# Altium PCB PCB1.PcbDoc
Units mil, origin at the board's own origin, x right, y up, seen from the top; angles counter-clockwise.
Board outline 2168 x 986 mil, 2 copper layers (Top Layer, Bottom Layer); 28 components, 46 nets, 153 pads, 15 vias.
Unrouted connection lines stored in the file: 15.
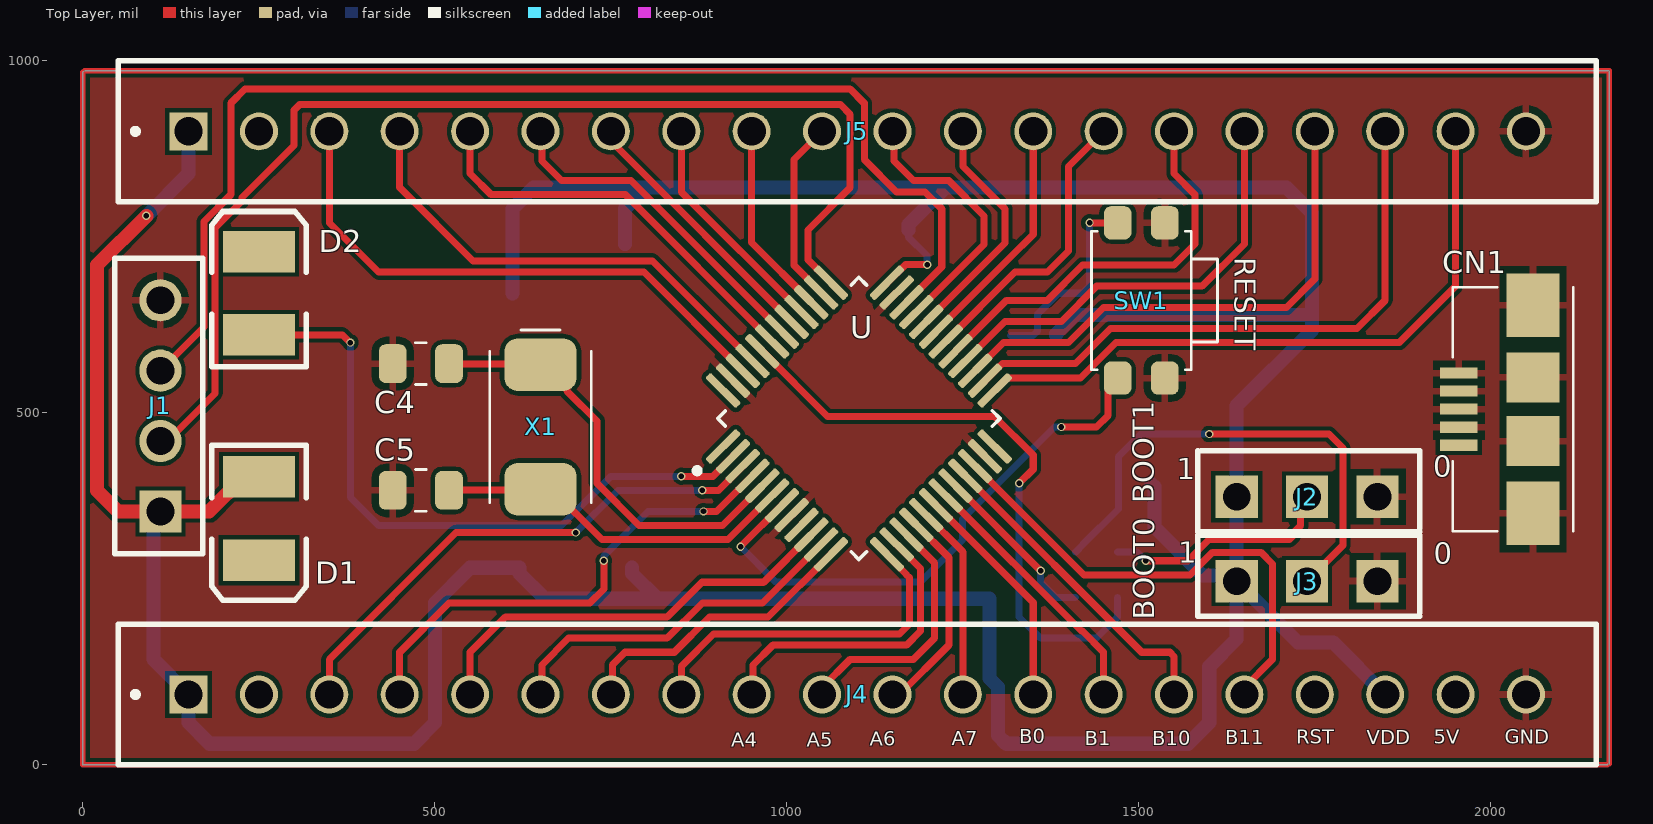
[diagram p0: Top Layer view]
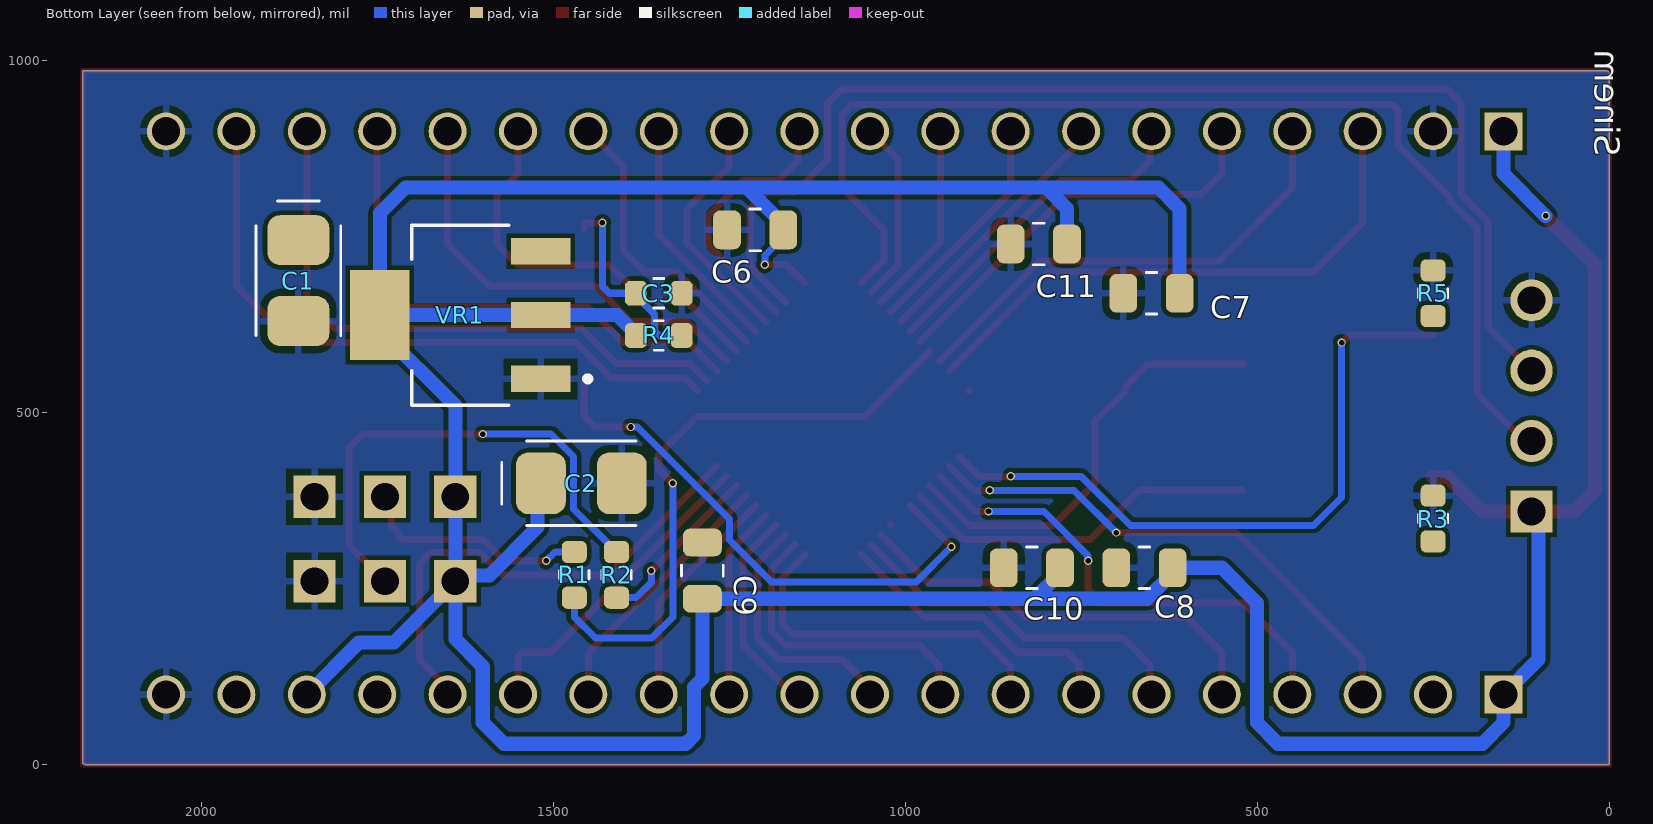
[diagram p1: Bottom Layer view, seen from below]
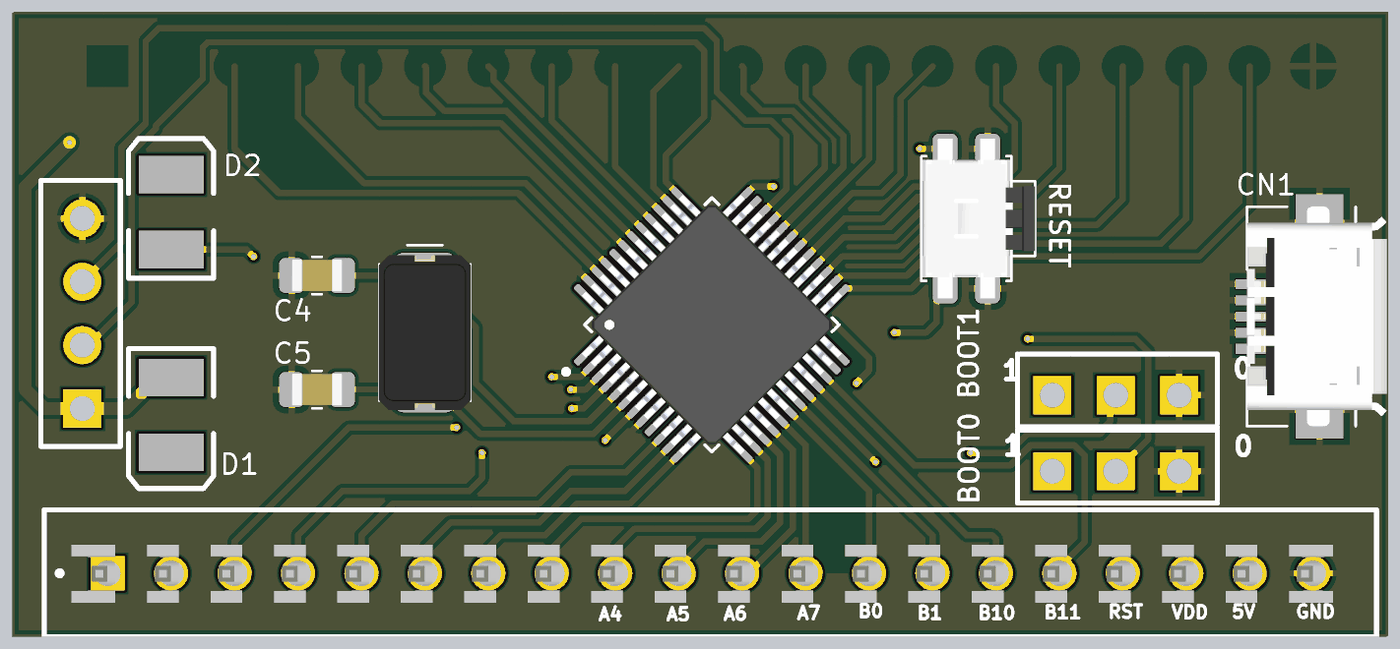
[diagram p2: 3D render of the assembled board from above, using the file's embedded part models]
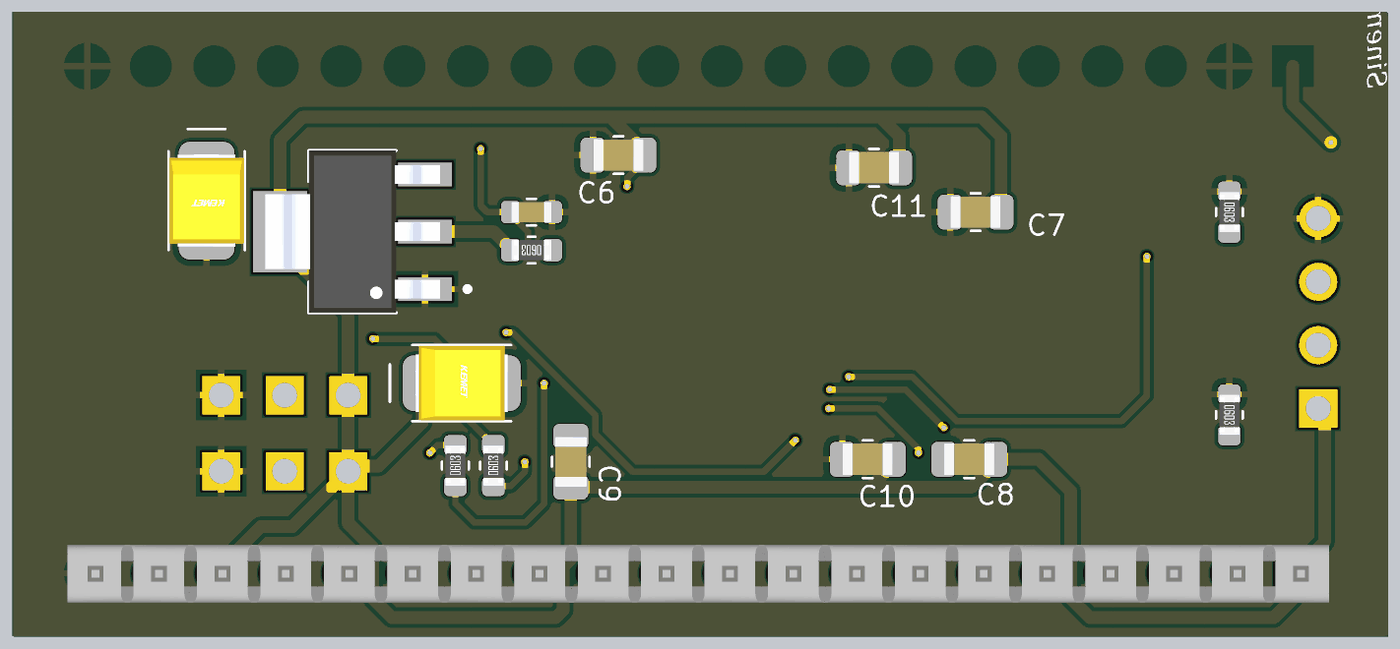
[diagram p3: 3D render of the assembled board from below, using the file's embedded part models]

## Layer stack, top to bottom
Top Solder: solder mask 0.4, Solder Resist, Dk 3.5
Top Layer: signal copper 1.4
Dielectric 1: dielectric 12.6, FR-4, Dk 4.8
Bottom Layer: signal copper 1.4
Bottom Solder: solder mask 0.4, Solder Resist, Dk 3.5

## Board outline
0,0 0,984.25 2.65,986 2168,986 2168,1.75 2165.35,0

## Design rules (kind name [scope] priority, off if disabled: settings)
Clearance [All] p1: gap=6 ignorepadtopadclearanceinfootprint=FALSE except(0: Arc-Hole Track-Hole SMDPad-Hole THPad-Hole Via-Hole Fill-Hole Poly-Hole Region-Hole Text-Hole)
PolygonConnect [All] p1: connectstyle=Relief reliefconductorwidth=10 reliefentries=4 polygonreliefangle="90 Angle" airgapwidth=10
RoutingVias [All] p1: holewidth=28 width=50 viastyle="Through Hole" minholewidth=28 minwidth=50 maxholewidth=28 maxwidth=50
SolderMaskExpansion [All] p1: expansion=4 istentingtop=FALSE
Width [All] p1: maxlimit=50 minlimit=10 preferedwidth=10
30 further rules are at their usual default settings.

## Classes and differential pairs
component class Sheet1: C1 C2 C3 C4 C5 C6 C7 C8 C9 C10 C11 CN1 D1 D2 J1 J2 J3 R1 R2 R3 R4 R5 SW1 U VR1 X1

## Components (designator, comment, footprint, x,y, rotation, side; value= is the part's Value field where it differs from the comment)
C1 "T495B106K025ATE750" KEMET_CAP_TAN-B 1862,688 r270 bottom
C2 "T495B106K025ATE750" KEMET_CAP_TAN-B 1460,400 r180 bottom
C3 "CL10B104KB8NNNC" SAMSUNG_CAP_0603_090 1350,670 r0 bottom
C4 "CL21C270JBANNNC" SAMSUNG_CAP_0805_075 480,570 r0 top
C5 "CL21C270JBANNNC" SAMSUNG_CAP_0805_075 480,390 r0 top
C6 "CL21A475KACLRNC" SAMSUNG_CAP_0805_095 1213,760 r180 bottom
C7 "CL21B104MACNNNC" SAMSUNG_CAP_0805_095 650,670 r180 bottom
C8 "CL21B104MACNNNC" SAMSUNG_CAP_0805_095 660,280 r180 bottom
C9 "CL21B104MACNNNC" SAMSUNG_CAP_0805_095 1288,276 r270 bottom
C10 "CL21B104MACNNNC" SAMSUNG_CAP_0805_095 820,280 r180 bottom
C11 "CL21B104MACNNNC" SAMSUNG_CAP_0805_095 810,740 r180 bottom
CN1 "5UR2M01MF-105G0BUHM1" AMTEK_5UR2M01MF-105G0BUHM1 2000.94,505.28 r90 top
D1 "LED3" 3.5X2.8X1.9 250,350 r270 top
D2 "LED3" 3.5X2.8X1.9 250,670 r90 top
J1 "HEADER 1X4" "HEADER 1X4_2.54mm" 130,365 r90 top
J2 "HEADER 1X3" "HEADER 1X3_2.54" 1784,156 r0 top
J3 "HEADER 1X3" "HEADER 1X3_2.54" 1784,36 r0 top
J4 "" "20*1 pin" 1937.24,525.26 r180 top
J5 "" "20*1 pin" 1937.24,1325.26 r180 top
R1 "0603SAJ0103T5E" ROYALOHM_RES_0603 1470,270 r90 bottom
R2 "0603SAJ0103T5E" ROYALOHM_RES_0603 1410,270 r90 bottom
R3 "0603SAJ0331T5E" ROYALOHM_RES_0603 250,350 r270 bottom
R4 "0603SAJ0103T5E" ROYALOHM_RES_0603 1350,610 r0 bottom
R5 "0603SAJ0331T5E" ROYALOHM_RES_0603 250,670 r270 bottom
SW1 "434331045822" WURTH_434331045822 1503.46,659.76 r270 top
U "STM32F103CBT6" QFP50P900X900X160-48N 1102.36,492.13 r45 top
VR1 "LM1117MPX-3.3" VREG_LM1117MPX-3.3 1632,639 r0 bottom
X1 "ABM7-8.000MHZ-D2Y-T" ABRACON_ABM7 650,480 r270 top

## Footprints (in the part's own frame and the unit in brackets; to place one, negate y for a bottom-side part, rotate by r counter-clockwise, add the part's x,y. Pads: shape width x height; smd on the part's side, far side on the other; paste and mask are expansions set on the pad)
3.5X2.8X1.9 [mm] "SM LED; 2 C-Bend Leads; Body 3.5 x 2.8 x 1.9 mm, inc leads (LxWxH typ)"
  rect 1.5x2.6 smd: 1(-1.5,0) 2(1.5,0)
  silkscreen extent -2.65,-1.7 2.95,1.7
"20*1 pin" [mm]
  rect 1.37x1.37 hole 1.02: 1(45.396,10.802)
  round 1.37 hole 1.02: 2(42.856,10.802) 3(40.316,10.802) 4(37.776,10.802) 5(35.236,10.802) 6(32.696,10.802) 7(30.156,10.802) 8(27.616,10.802) 9(25.076,10.802) 10(22.536,10.802) 11(19.996,10.802) 12(17.456,10.802) 13(14.916,10.802) 14(12.376,10.802) 15(9.836,10.802) 16(7.296,10.802) 17(4.756,10.802) 18(2.216,10.802) 19(-0.324,10.802) 20(-2.864,10.802)
  silkscreen extent -5.4,8.26 47.94,13.34, body extent -3.66,9.65 46.84,11.99, height 2.79
ABRACON_ABM7 [mm]
  rrect50% 1.9x2.6 smd paste+0 mask+0.04: 1(-2.25,0) 2(2.25,0)
  silkscreen extent -3.5,-1.83 2.73,1.83, body extent -3.1,-1.85 3.1,1.85, height 1.39
AMTEK_5UR2M01MF-105G0BUHM1 [mm]
  rect 0.4x1.35 smd mask+0.04: 1(-1.3,1.175) 2(-0.65,1.175) 3(0,1.175) 4(0.65,1.175) 5(1.3,1.175)
  rect 2.3x1.9 smd mask+0.04: S(-3.75,-1.5) S(3.75,-1.5)
  rect 1.8x1.9 smd mask+0.04: S(-1.15,-1.5) S(1.15,-1.5)
  silkscreen extent -4.4,-2.95 4.4,1.4, body extent -4.4,-4.2 4.4,1.4, height 2.83
"HEADER 1X3_2.54" [mil]
  rect 60x60 hole 39.37: 1(-145,225) 2(-45,225) 3(55,225)
  silkscreen extent -200,175 115,290, body extent -195,180 105,280, height 276
"HEADER 1X4_2.54mm" [mil]
  rect 60x60 hole 39.37: 1(-5,20)
  round 60 hole 39.37: 2(95,20) 3(195,20) 4(295,20)
  silkscreen extent -65,-40 355,85, body extent -55,-30 345,70, height 276
KEMET_CAP_TAN-B [mm]
  rrect50% 1.8x2.23 smd paste+0 mask+0.04: 1(-1.46,0) 2(1.46,0)
  silkscreen extent -2.88,-1.53 1.98,1.53, body extent -1.85,-1.5 1.85,1.5, height 2.1
QFP50P900X900X160-48N [mm]
  rrect50% 1.56x0.28 smd: 1(-4.18,2.75) 2(-4.18,2.25) 3(-4.18,1.75) 4(-4.18,1.25) 5(-4.18,0.75) 6(-4.18,0.25) 7(-4.18,-0.25) 8(-4.18,-0.75) 9(-4.18,-1.25) 10(-4.18,-1.75) 11(-4.18,-2.25) 12(-4.18,-2.75) 25(4.18,-2.75) 26(4.18,-2.25) 27(4.18,-1.75) 28(4.18,-1.25) 29(4.18,-0.75) 30(4.18,-0.25) 31(4.18,0.25) 32(4.18,0.75) 33(4.18,1.25) 34(4.18,1.75) 35(4.18,2.25) 36(4.18,2.75)
  rrect50% 0.28x1.56 smd: 13(-2.75,-4.18) 14(-2.25,-4.18) 15(-1.75,-4.18) 16(-1.25,-4.18) 17(-0.75,-4.18) 18(-0.25,-4.18) 19(0.25,-4.18) 20(0.75,-4.18) 21(1.25,-4.18) 22(1.75,-4.18) 23(2.25,-4.18) 24(2.75,-4.18) 37(2.75,4.18) 38(2.25,4.18) 39(1.75,4.18) 40(1.25,4.18) 41(0.75,4.18) 42(0.25,4.18) 43(-0.25,4.18) 44(-0.75,4.18) 45(-1.25,4.18) 46(-1.75,4.18) 47(-2.25,4.18) 48(-2.75,4.18)
  silkscreen extent -5.56,-3.6 3.6,3.6, body extent -4.5,-4.5 4.5,4.5, height 1.6
ROYALOHM_RES_0603 [mm]
  rrect50% 0.8x0.9 smd paste+0 mask+0.04: 1(-0.825,0) 2(0.825,0)
  silkscreen extent -0.15,-0.53 0.15,0.53, body extent -0.8,-0.4 0.8,0.4, height 0.45
SAMSUNG_CAP_0603_090 [mm]
  rrect50% 0.8x0.9 smd paste+0 mask+0.04: 1(-0.825,0) 2(0.825,0)
  silkscreen extent -0.18,-0.53 0.18,0.53, body extent -0.8,-0.41 0.8,0.41, height 0.81
SAMSUNG_CAP_0805_075 [mm]
  rrect50% 1x1.4 smd paste+0 mask+0.04: 1(-1.016,0) 2(1.016,0)
  silkscreen extent -0.19,-0.75 0.19,0.75, body extent -1,-0.64 1,0.64, height 0.76
SAMSUNG_CAP_0805_095 [mm]
  rrect50% 1x1.4 smd paste+0 mask+0.04: 1(-1.016,0) 2(1.016,0)
  silkscreen extent -0.19,-0.75 0.19,0.75, body extent -1,-0.64 1,0.64, height 0.96
VREG_LM1117MPX-3.3 [mm]
  rect 2.15x0.95 smd: 1(-2.9,2.3) 2(-2.9,0) 3(-2.9,-2.3)
  rect 2.15x3.25 smd: 4(2.9,0)
  silkscreen extent -4.7,-3.25 1.75,3.25, body extent -3.5,-3.25 3.5,3.25, height 1.8
WURTH_434331045822 [mm]
  rrect50% 1.2x1 smd mask+0.04: 1(2.8,0.85) 2(2.8,-0.85) 3(-2.8,0.85) 4(-2.8,-0.85)
  silkscreen extent -2.5,-1.8 2.5,2.75, body extent -3.2,-1.75 3.2,2.75, height 1.65

## Part data
C1 C2: "CAP TANT 10UF 10% 25V 1411", Capacitance="10 µF", Supplier Part Number 1=399-18418-1-ND, Supplier 1=Digi-Key, Supplier 2=Farnell, Supplier 3=Mouser, Supplier Part Number 2=2470989, Supplier Part Number 3=80-T495B106K25ATE750
C3: "CAP CER 0.1UF 50V X7R 0603", Capacitance="0.1 µF", Supplier Part Number 1=1276-1000-6-ND, Supplier 1=Digi-Key, Supplier 2=Mouser, Supplier 3="Arrow Electronics", Supplier Part Number 2=187-CL10B104KB8NNNC, Supplier Part Number 3=CL10B104KB8NNNC
C4 C5: "CAP CER 27PF 50V C0G/NP0 0805", Capacitance="27 pF", Supplier Part Number 1=1276-1285-1-ND, Supplier 1=Digi-Key
C6: "CAP CER 4.7UF 25V X5R 0805", Capacitance="4.7 µF", Supplier Part Number 1=1276-2415-1-ND, Supplier 1=Digi-Key, Supplier 2=Mouser, Supplier 3="Arrow Electronics", Supplier Part Number 2=187-CL21A475KACLRNC, Supplier Part Number 3=CL21A475KACLRNC
C7 C8 C9 C10 C11: "CAP CER 0.1UF 25V X7R 0805", Capacitance="0.1 µF", Supplier Part Number 1=1276-2449-1-ND, Supplier 1=Digi-Key, Supplier 2=Mouser, Supplier 3="Arrow Electronics", Supplier Part Number 2=187-CL21B104MACNNNC, Supplier Part Number 3=CL21B104MACNNNC
CN1: "CONN RCPT MICRO USB AB 5P SMD RA"
D1 D2: "Typical BLUE SiC LED", DatasheetVersion=16-Apr-2002, LatestRevisionDate=17-Dec-2003, LatestRevisionNote="PCB Footprint replaced.", PackageDescription="SM LED; 2 C-Bend Leads; Body 3.5 x 2.8 x 1.9 mm, inc leads (LxWxH typ)", PackageReference=3.5X2.8X1.9, PackageVersion=16-Apr-2002, Published=8-Jun-2000, Publisher="Altium Limited"
J4 J5: library part "20 pin header"
R1 R2 R4: "RES SMD 10K OHM 5% 1/10W 0603", Resistance="10 k"
R3 R5: "RES SMD 330R OHM 5% 1/10W 0603", Resistance=330
SW1: "SWITCH TACTILE SPST-NO 0.05A 12V", Supplier Part Number 1=732-7055-1-ND, Supplier 1=Digi-Key, Supplier 2=Farnell, Supplier 3=Mouser, Supplier Part Number 2=1867997, Supplier Part Number 3=710-434331045822
U: "ARMÂ® CortexÂ®-M3 STM32F1 Microcontroller IC 32-Bit 72MHz 128KB _128K x 8_ FLASH", Package="LQFP-48 STMicroelectronics", Availability=Unavailable, MF=STMicroelectronics, MP=STM32F103CBT6, Price=None, SnapEDA_Link=https://www.snapeda.com/parts/STM32F103CBT6/STMicroelectronics/view-part/38865/?ref=snap
VR1: "800-mA 15-V linear voltage regulator", Package="SOT-223-4 Texas Instruments", Availability="In Stock", Check_prices=https://www.snapeda.com/parts/LM1117MPX-3.3/Texas+Instruments/view-part/?ref=eda, MF="Texas Instruments", MP=LM1117MPX-3.3, Price=None, Purchase-URL=https://pricing.snapeda.com/search/part/LM1117MPX-3.3/?ref=eda, SnapEDA_Link=https://www.snapeda.com/parts/LM1117MPX-3.3/Texas+Instruments/view-part/?ref=snap
X1: "CRYSTAL 8.0000MHZ 18PF SMD", Frequency="8 MHz", Supplier Part Number 1=535-9831-6-ND, Supplier 1=Digi-Key, Supplier 2=Farnell, Supplier 3=Mouser, Supplier 4="Arrow Electronics", Supplier Part Number 2=2101337, Supplier Part Number 3=815-ABM7-8-D2Y-T, Supplier Part Number 4=ABM7-8.000MHZ-D2Y-T

## Via types
v1: diameter 11.81, hole 7.87, Top Layer to Bottom Layer, 15 vias

## Nets (pads, with @x,y where several pads share a name; then routed paths per layer and width w, separated by ;. In a path a pad name is that pad's centre, name@x,y a point inside that pad or via, vN(x,y) a via of type N, cw(c..) or ccw(c..) an arc to the next point about the centre after c; other vN are vias at no path point)
+5V: C1.1 CN1.1 J4.19 VR1.3
BOOT0: R1.1 U.44 | length 876.7
  Top Layer w10: U.44 1057.73,495 1295,495 1350,440 1350,420 v1(1330,400)
  Bottom Layer w10: v1(1330,400) 1330,210 1360,180 1440,180 1470,210 R1.1
BOOT1: R2.1 U.20 | length 245.8
  Top Layer w10: U.20 v1(1360.52,275.73)
  Bottom Layer w10: v1(1360.52,275.73) 1360.52,259.48 1382.48,237.52 R2.1
GND: C1.2 C2.2 C3.1 C4.1 C5.1 C6.1 C7.1 C8.1 C9.1 C10.1 C11.1 CN1.2 CN1.3 CN1.4 CN1.5 CN1.S J1.4 J2.3 J3.3 J4.20 J5.2 J5.20 R3.1 R5.1 SW1.1 SW1.3 U.8 U.23 U.35 U.47 VR1.1
NetD1_2: D1.2 R3.2
NetD2_2: D2.2 R5.2
NetJ2_2: J2.2 R1.2 | length 333
  Top Layer w10: v1(1510,290) 1569.82,290 1599.82,320 1714.14,320 1720,325.86 1720,330 1730,340 1730,372 J2.2
  Bottom Layer w10: R1.2 1497.52,302.48 v1(1510,290)
NetJ3_2: J3.2 R2.2 | length 711.7
  Top Layer w10: v1(1600,470) 1770,470 1790,450 1790,312 J3.2
  Bottom Layer w10: R2.2 1410.41,302.48 1420.94,313.01 1420.94,313.42 1471.05,363.53 1471.05,438.08 1502.97,470 v1(1600,470)
NRST: C3.2 J4.17 R4.1 SW1.2 SW1.4 U.7 | length 1068.3
  Top Layer w10: v1(934.16,310) U.7 ; v1(1390,480) 1440,480 1456.54,496.54 SW1.2@1456.54,541.76 ; v1(1430,770) 1455.68,770 1456.54,769.15 SW1.4@1456.54,762.24
  Bottom Layer w10: v1(934.16,310) 984.16,260 1190,260 1249.44,319.44 1249.44,349.44 1380,480 v1(1390,480) ; R4.1 1349.87,610 1355.73,615.86 1355.73,639.73 1382.48,666.48 C3.2 1420,670 1430,680 v1(1430,770)
OSC_IN: C4.2 U.5 X1.1 | length 619.5
  Top Layer w10: C4.2 520.22,569.78 648.8,569.78 X1.1 656.36,568.58 687.72,537.22 687.72,530.86 730,488.58 730,400 790,340 908.48,340 U.5
OSC_OUT: C5.2 U.6 X1.2 | length 515.2
  Top Layer w10: C5.2 520.22,390.22 648.8,390.22 X1.2 666.01,391.42 737.42,320 916.32,320 U.6
PA0: J4.5 U.10 | length 613.9
  Top Layer w10: J4.5 550,160 600,210 830,210 879.43,259.43 967.1,259.43 U.10
PA1: J4.6 U.11 | length 510.3
  Top Layer w10: J4.6 651.97,101.97 651.97,141.97 690,180 830,180 880,230 965.51,230 U.11
PA2: J4.7 U.12 | length 418.5
  Top Layer w10: J4.7 751.97,101.97 751.97,141.97 770,160 840,160 890,210 973.35,210 U.12
PA3: J4.8 U.13 | length 501.2
  Top Layer w10: J4.8 850,140 896,186 1160,186 1174,200 1174,266 1170,270 1170,270.65 1142.17,298.48 U.13
PA4: J4.9 U.14 | length 437.9
  Top Layer w10: J4.9 951.97,101.97 951.97,141.97 980,170 1170,170 1190,190 1190,279.21 U.14
PA5: J4.10 U.15 | length 362.6
  Top Layer w10: J4.10 1050,110 1090,150 1180,150 1210,180 1210,287.05 U.15
PA6: J4.11 U.16 | length 299
  Top Layer w10: J4.11 1160,100 1230,170 1230,294.89 U.16
PA7: J4.12 U.17 | length 276.5
  Top Layer w10: U.17 1250,302.73 J4.12
PA8: J5.15 U.29 | length 575.9
  Top Layer w10: U.29 1311.99,660 1370,660 1420,710 1550,710 1580,740 1580,810 1550,840 J5.15
PA9: J5.14 U.30 | length 418.2
  Top Layer w10: U.30 1324.16,700 1370,700 1400,730 1400,850 J5.14
PA10: J5.13 U.31 | length 341.8
  Top Layer w10: U.31 1316.32,720 1350,753.68 J5.13
PA11: J5.12 U.32 | length 341.9
  Top Layer w10: U.32 1310,741.52 1310,790 1250,850 J5.12
PA12: J5.11 U.33 | length 379.6
  Top Layer w10: J5.11 1151.97,898.03 1151.97,858.03 1180,830 1230,830 1280,780 1280,739.36 U.33
PA15: J5.10 U.38 | length 261.4
  Top Layer w10: U.38 1010,709.76 1010,860 J5.10
PB0: J4.13 U.18 | length 326.1
  Top Layer w10: U.18 1350,230.57 J4.13
PB1: J4.14 U.19 | length 376.6
  Top Layer w10: U.19 1418.41,190 1420,190 1450,160 J4.14
PB3: J5.9 U.39 | length 277.9
  Top Layer w10: J5.9 950,741.92 U.39
PB4: J5.8 U.40 | length 327.5
  Top Layer w10: J5.8 850,814.09 U.40
PB5: J5.7 U.41 | length 377
  Top Layer w10: J5.7 758.41,891.59 758.41,877.84 U.41
PB6: J5.6 U.42 | length 484.3
  Top Layer w10: J5.6 651.97,898.03 651.97,858.03 680,830 778.41,830 U.42
PB7: J5.5 U.43 | length 587.8
  Top Layer w10: J5.5 550,840 580,810 770.57,810 U.43
PB8: J5.4 U.45 | length 683.2
  Top Layer w10: J5.4 450,820 554,716 808.89,716 U.45
PB9: J5.3 U.46 | length 804.4
  Top Layer w10: J5.3 350,770 420,700 797.05,700 U.46
PB10: J4.15 U.21 | length 456.8
  Top Layer w10: U.21 1504.09,160 1544.14,160 1550,154.14 J4.15
PB11: J4.16 U.22 | length 708.7
  Top Layer w10: U.22 1421.92,270 1572.44,270 1604.44,302 1673.56,302 1690,285.56 1690,150 1650,110 J4.16
PB12: J5.19 U.25 | length 936
  Top Layer w10: U.25 1313.1,549.75 1417.13,549.75 1467.37,600 1870,600 1950,680 J5.19
PB13: J5.18 U.26 | length 7155.1
  Top Layer w7.87: 0,984.25 0,0 2165.35,0 ; 2.65,986 2168,986 2168,1.75
  Top Layer w10: U.26 1282.09,545.85 1306.24,570 1410,570 1460,620 1810,620 1850,660 J5.18
PB14: J5.17 U.27 | length 746.5
  Top Layer w10: U.27 1307.67,600 1400,600 1450,650 1710,650 1750,690 J5.17
PB15: J5.16 U.28 | length 625.4
  Top Layer w10: U.28 1309.83,630 1390,630 1440,680 1590,680 1650,740 J5.16
PC13: D2.1 J4.2 U.2 | length 955.2
  Top Layer w10: D2.1 368.57,610.94 379.51,600 v1(380,600) ; v1(850,410) 894.96,410 U.2
  Bottom Layer w10: v1(380,600) 380,380 420,340 680,340 750,410 v1(850,410)
PC14: J4.3 U.3 | length 751
  Top Layer w10: J4.3 350,150 530,330 v1(700,330) ; v1(880,390) 902.8,390 U.3
  Bottom Layer w10: v1(700,330) 760,390 v1(880,390)
PC15: J4.4 U.4 | length 692.5
  Top Layer w10: J4.4 450,160 520,230 720,230 740,250 v1(740,290) ; v1(881.57,360) 899.92,360 950.47,410.56 U.4
  Bottom Layer w10: v1(740,290) 740,297.04 802.96,360 v1(881.57,360)
SWCLK: J1.2 U.37 | length 1631
  Top Layer w10: J1.2 120,460 187.82,527.82 187.82,763.14 226,801.32 226,806 300,880 300,930 307.97,937.97 1076.17,937.97 1090,924.14 1090,820 1030,760 1030,717.6 U.37
SWDIO: J1.3 U.34 | length 1710.5
  Top Layer w10: J1.3 171.82,621.82 171.82,771.82 210,810 210,940 230,960 1090,960 1110,940 1110,860 1156,814 1196,814 1220,790 1220,707.2 U.34
VDD: C2.1 C6.2 C7.2 C8.2 C9.2 C10.2 C11.2 D1.1 J1.1 J2.1 J3.1 J4.1 J4.18 J5.1 R4.2 U.1 U.9 U.24 U.36 U.48 VR1.2 VR1.4 | length 6342.3
  Top Layer w10: U.48@909.44,531.21 U.48 ; U.9 U.9@1020.79,341.68 ; U.36 1142.9,685.05 1168.4,710.55 v1(1199.45,710.55)
  Top Layer w20: v1(90,780) 20,710 20,390 50,360 J1.1 179.29,360 228.35,409.06 D1.1
  Bottom Layer w10: C6.2 1173,749.51 1199.1,723.41 1199.1,710.9 v1(1199.45,710.55)
  Bottom Layer w20: v1(90,780) 150,840 J5.1 ; J1.1 100,350 100,150 J4.1 150,60 180,30 470,30 500,60 500,230 550,280 C8.2 620,272.13 656.13,236 816.13,236 ; C7.2 610,790 640,820 800,820 ; C11.2 770,790 800,820 ; C10.2 780,272.13 816.13,236 ; C6.2 1173,767.87 1225.13,820 ; R4.2 1382.48,611.97 1409.51,639 VR1.2 VR1.4 ; C2.1 1522.18,395.3 1522.18,337.82 1590.72,269.28 1630.72,269.28 J3.1 ; J4.18 1776.25,173.75 1726.25,173.75 J3.1 ; 800,820 1225.13,820 ; 816.13,236 C9.2 1288,122.77 1300,110.77 1300,41.72 1311.72,30 1570,30 1600,60 1600,140 1639,179 J3.1 ; 1225.13,820 1710,820 1746.17,783.83 VR1.4 ; J3.1 J2.1 1639,510.17 1746.17,617.35 VR1.4

## Polygon pours and split planes (outlines as drawn)
GND on Bottom Layer "GND_L02_P000" (solid, pour order 0): 0,984 2,986 2167,986 2167,2 2166,1 0,1 -1,2 0,2 0,983 1,984
GND on Top Layer "GND_L01_P001" (solid, pour order 1): 0,984.25 1.75,986 2168,986 2168,1.75 1.75,1.75 0,0

## Other copper
Top Layer:
  pour cut-out: 1010,860 1010,771 1008,769 1017,760 1030,760 1090,820 1090,924.14 1074.14,924.14
  pour cut-out: 950,900 1050,900 1010,860 1010,709.76 979.76,709.76 979,709 950,738 950,741.92
  pour cut-out: 1250,100 1350,100 1350,230.57 1349.43,230.57 1264,316 1250.73,302.73 1250,302.73
  pour cut-out: 350,900 450,900 450,820 554,716 554,700 420,700 350,770
Bottom Layer:
  pour cut-out: 700,330 740,290 740,297.04 802.96,360 772.96,390 760,390

## Silkscreen, mask and mechanical layers (free items; w line width, h text height)
Top Overlay:
  text "RESET" at 1636,721 h30 r270
  text "0" at 1918,409 h30
  text "1" at 1554,406 h30
  text "BOOT1" at 1521,372 h30 r90
  text "1" at 1556,287 h30
  text "0" at 1919,286 h30
  text "BOOT0" at 1522,206 h30 r90
  text "B0" at 1330,31 h20
  text "RST" at 1724,30 h20
  text "5V" at 1919,30 h20
  text "GND" at 2020,30 h20
  text "B11" at 1623,29 h20
  text "VDD" at 1824,29 h20
  text "A7" at 1234,28 h20
  text "B1" at 1423,28 h20
  text "B10" at 1519,28 h20
  text "A6" at 1118,27 h20
  text "A4" at 921,26 h20
  text "A5" at 1028,26 h20
Bottom Overlay:
  text "Sinem" at 32.59,864.94 h60 r90